# Altium PCB Logic_Unit_1st.PcbDoc
Units mil, origin at the board's own origin, x right, y up, seen from the top; angles counter-clockwise.
Board outline 2420 x 1955 mil, 2 copper layers (Top Layer, Bottom Layer); 18 components, 36 nets, 112 pads, 0 vias.
Unrouted connection lines stored in the file: 47.
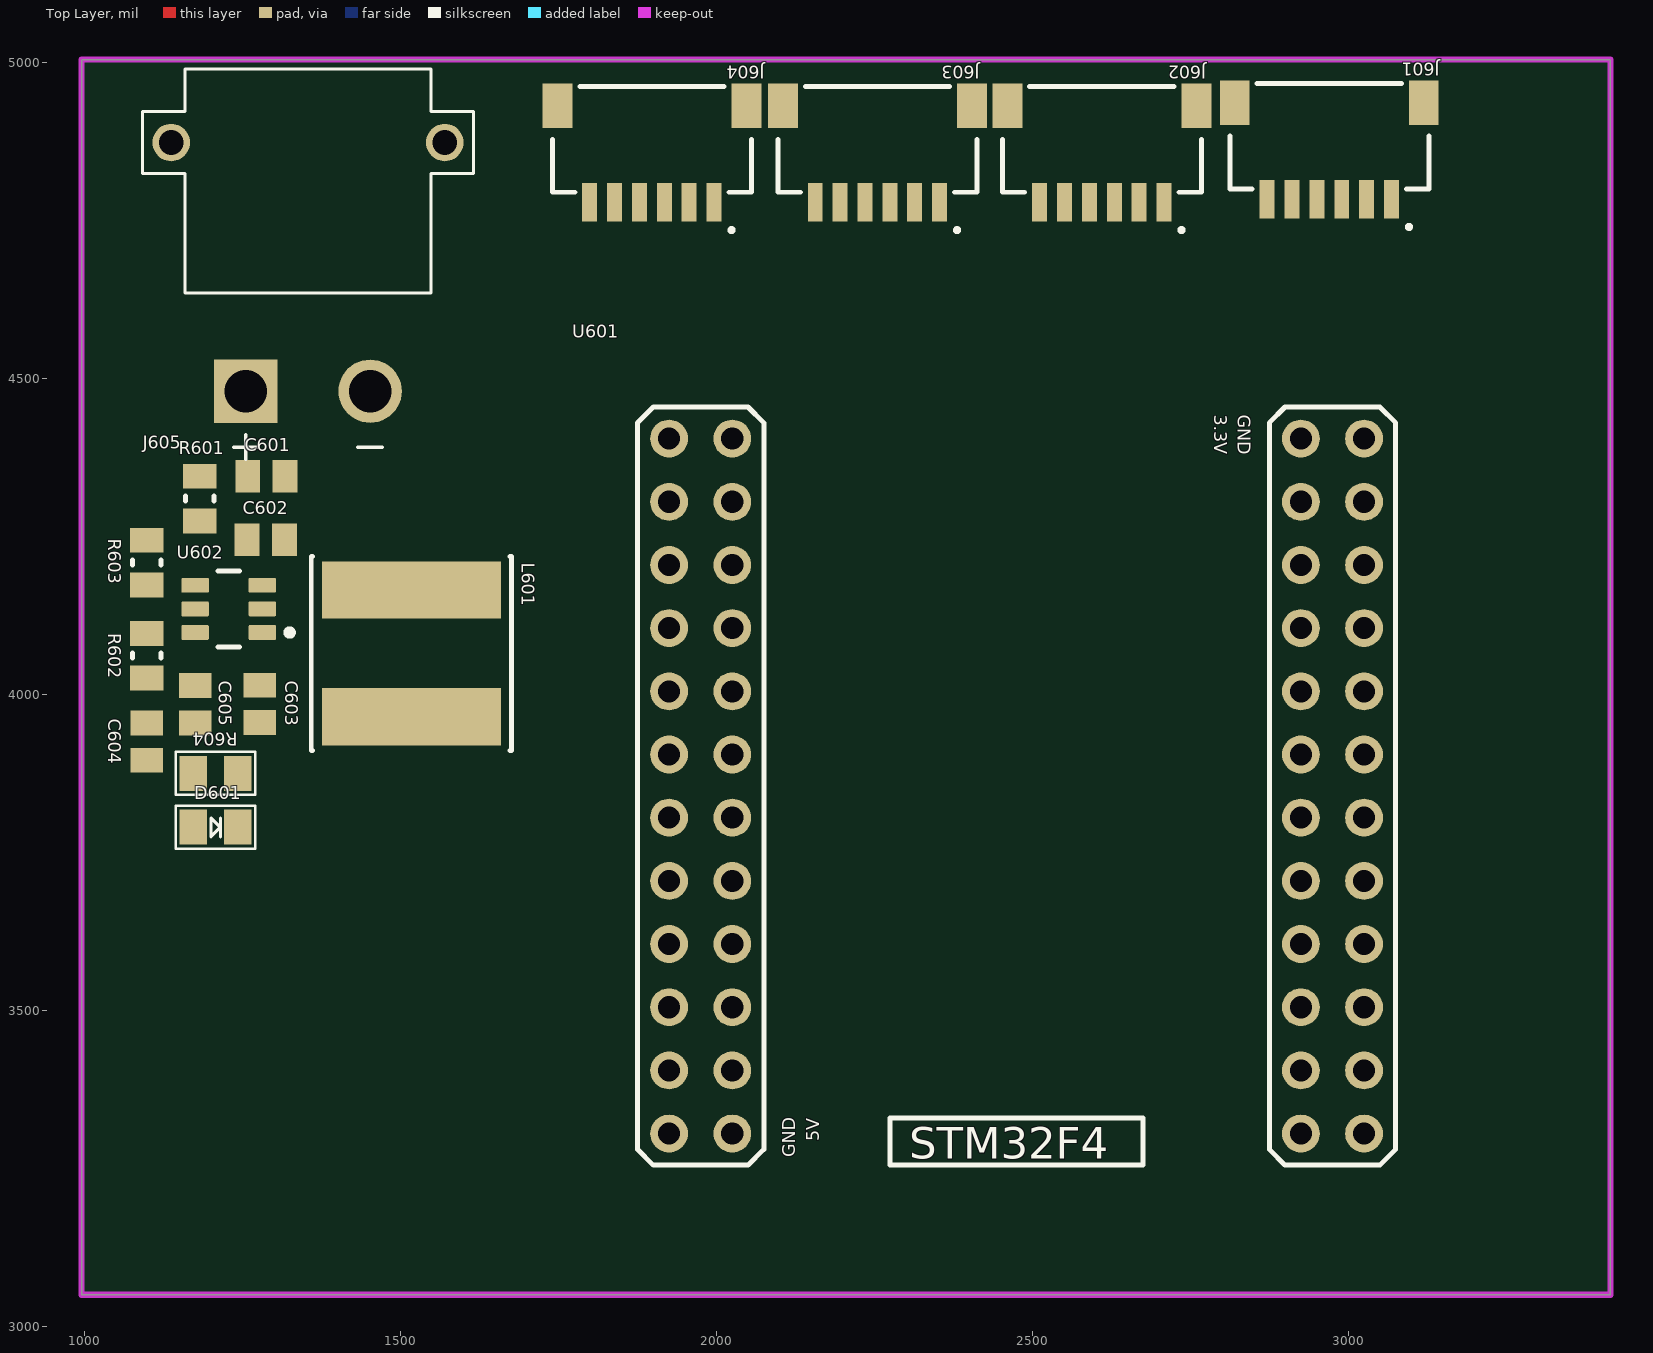
[diagram p0: Top Layer view]
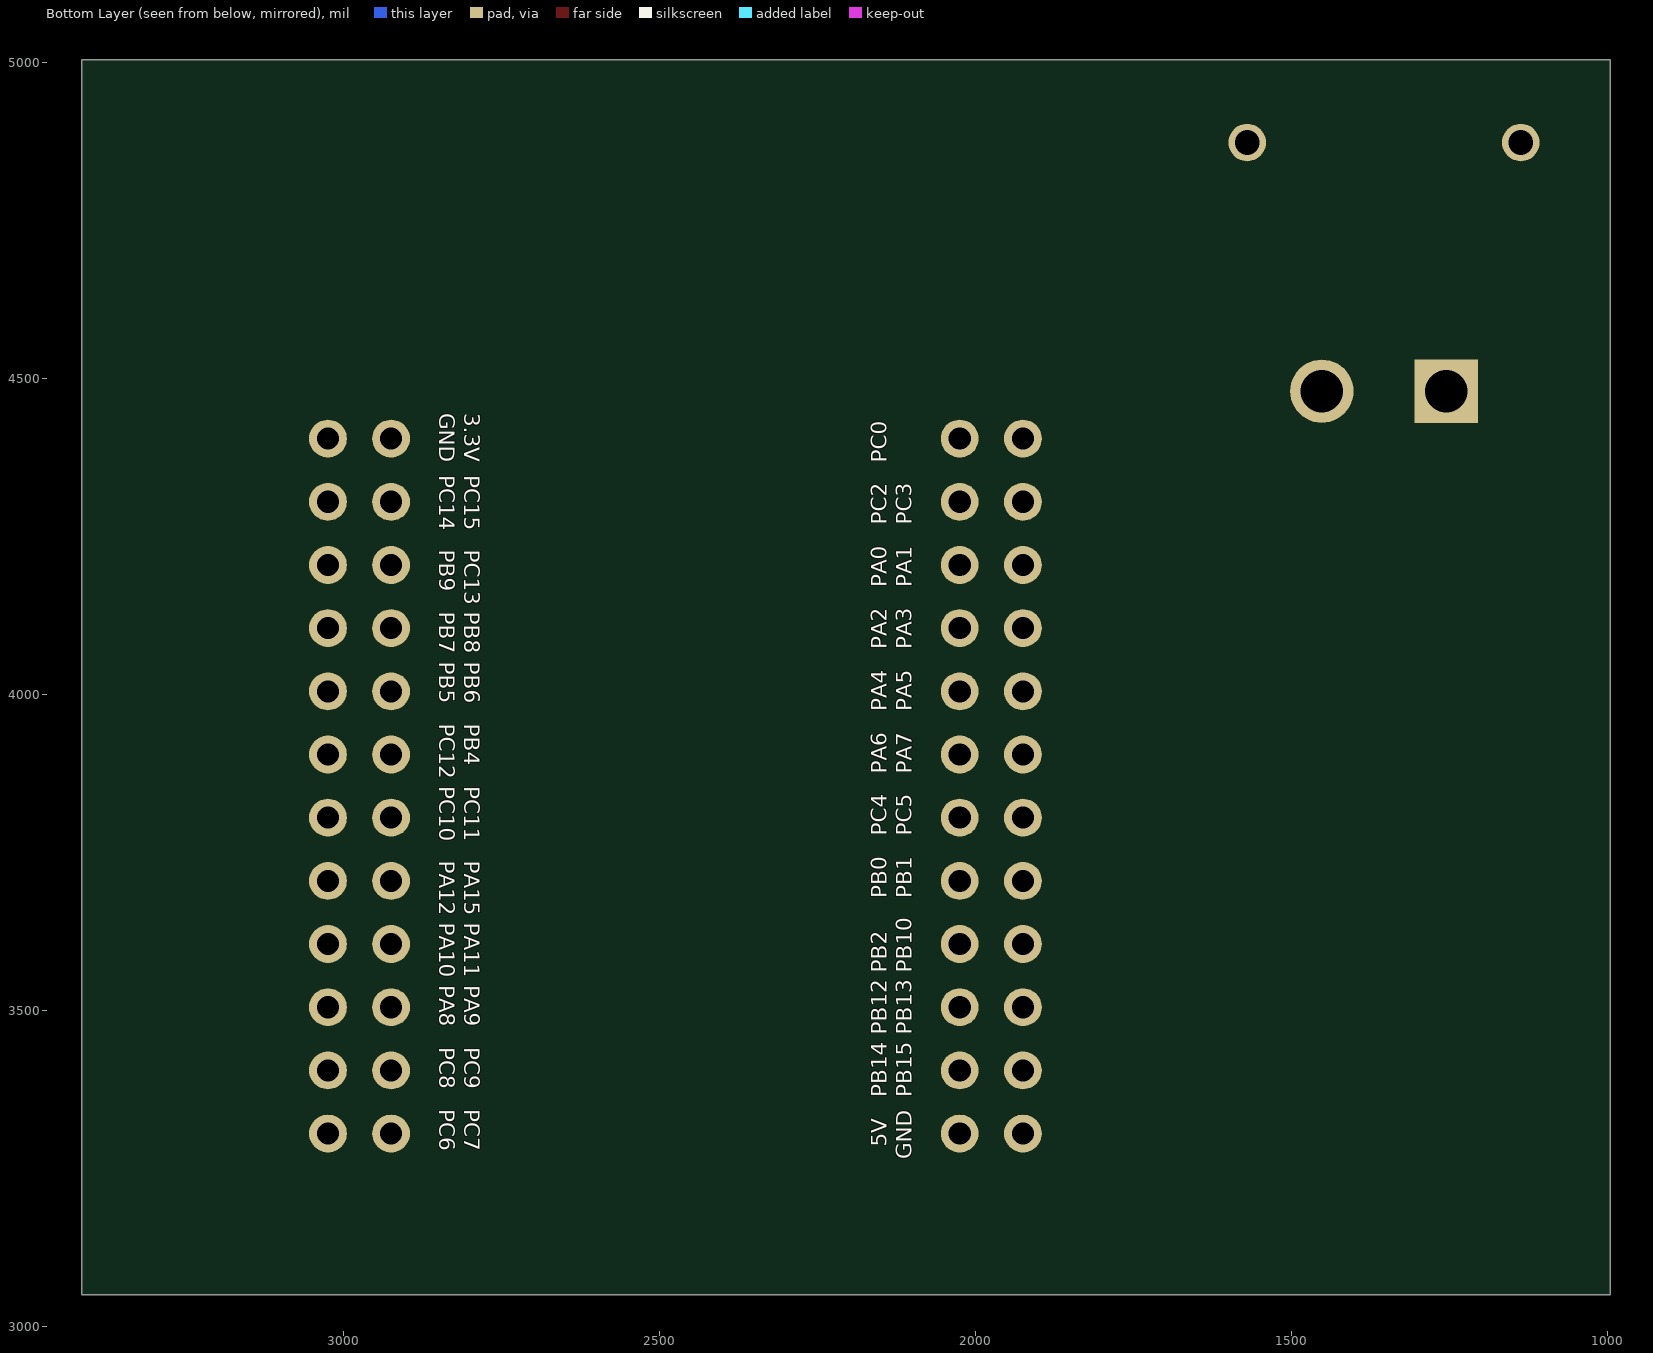
[diagram p1: Bottom Layer view, seen from below]

## Layer stack, top to bottom
Top Solder: solder mask 0.4, Solder Resist, Dk 3.5
Top Layer: signal copper 1.4
Dielectric 1: dielectric 12.6, FR-4, Dk 4.8
Bottom Layer: signal copper 1.4
Bottom Solder: solder mask 0.4, Solder Resist, Dk 3.5

## Board outline
995,3050 995,5005 3415,5005 3415,3050

## Design rules (kind name [scope] priority, off if disabled: settings)
Clearance [All] p1: gap=10 ignorepadtopadclearanceinfootprint=FALSE
PolygonConnect [All] p1: connectstyle=Relief reliefconductorwidth=10 reliefentries=4 polygonreliefangle="90 Angle" airgapwidth=10
RoutingVias [All] p1: holewidth=28 width=50 viastyle="Through Hole" minholewidth=28 minwidth=50 maxholewidth=28 maxwidth=50
SolderMaskExpansion [All] p1: expansion=4 istentingtop=FALSE
SupplyNets "Schematic Supply Nets_2" [InNet('3.3V')] p1: voltage=0.000
SupplyNets "Schematic Supply Nets_1" [InNet('5V')] p2: voltage=0.000
SupplyNets "Schematic Supply Nets" [InNet('GND')] p3: voltage=0.000
Width [All] p1: maxlimit=10 minlimit=10 preferedwidth=10
30 further rules are at their usual default settings.

## Classes and differential pairs
component class Designator: U601
component class Connector: J601 J602 J603 J604 J605
component class 5V_Regulator: C601 C602 C603 C604 C605 D601 L601 R601 R602 R603 R604 U602

## Components (designator, comment, footprint, x,y, rotation, side; value= is the part's Value field where it differs from the comment)
C601 "non-polar_Capacitor" 0805#1 1287.52,4345.47 r0 top
C602 "non-polar_Capacitor" 0805#1 1286.54,4245 r0 top
C603 "non-polar_Capacitor" 0805#1 1277.01,3985 r90 top
C604 "non-polar_Capacitor" 0805#1 1098.23,3925.47 r90 top
C605 "non-polar_Capacitor" 0805#1 1175.2,3984.53 r270 top
D601 "LED" SMD_LED 1207.01,3790 r180 top
J601 "SM06B-SRSS-TB__LF__SN_" SM06B-SRSS-TB 2970,4800 r180 top
J602 "SM06B-SRSS-TB__LF__SN_" SM06B-SRSS-TB 2610,4795 r180 top
J603 "SM06B-SRSS-TB__LF__SN_" SM06B-SRSS-TB 2254.7,4795 r180 top
J604 "SM06B-SRSS-TB__LF__SN_" SM06B-SRSS-TB 1897.72,4795 r180 top
J605 "XT30PW-M" AMASS_XT30PW-M 1353.43,4873.7 r0 top
L601 "inductor_SRP7030CA" FP-SRP7030CA-MFG 1517.01,4065 r0 top
R601 "Resistor" 0805#2 1182.01,4310.04 r270 top
R602 "Resistor" 0805#2 1098.23,4061.38 r270 top
R603 "Resistor" 0805#2 1098.23,4208.74 r270 top
R604 "Resistor" SMD_Resistor 1207.01,3875 r180 top
U601 "STM32_MODULE" DIP_STM32_MODULE 2475,3855 r0 top
U602 "TPS563200DDCR" FP-DDC0006A-MFG 1227.95,4135.47 r180 top

## Footprints (in the part's own frame and the unit in brackets; to place one, negate y for a bottom-side part, rotate by r counter-clockwise, add the part's x,y. Pads: shape width x height; smd on the part's side, far side on the other; paste and mask are expansions set on the pad)
0805#1 [mm] "Chip Capacitor, 2-Leads, Body 2.00x1.25mm, IPC High Density"
  rect 1x1.3 smd: 1(-0.75,0) 2(0.75,0)
  body extent -1.05,-0.67 1.05,0.68, height 1.35
0805#2 [mm] "SMD_Resistor"
  rect 1x1.35 smd: 1(-0.9,0) 2(0.9,0)
  silkscreen extent -0.1,-0.58 0.1,0.58, body extent -1.05,-0.67 1.05,0.67, height 0.55
AMASS_XT30PW-M [mm]
  round 2.55 hole 1.7: N(2.5,-10)
  rect 2.55x2.55 / inner round 2.55 / far side rect 2.55x2.55 hole 1.7: P(-2.5,-10)
  round 1.508 hole 1: S1(5.5,0) S2(-5.5,0)
  silkscreen extent -6.65,-12.75 6.65,2.95, body extent -6.65,-11 6.65,2.95, height 5
DIP_STM32_MODULE [mil]
  round 60 hole 35: 1(-550,550) 2(-550,450) 3(-550,350) 4(-550,250) 5(-550,150) 6(-550,50) 7(-550,-50) 8(-550,-150) 9(-550,-250) 10(-550,-350) 11(-550,-450) 12(-550,-550) 13(-450,-550) 14(-450,-450) 15(-450,-350) 16(-450,-250) 17(-450,-150) 18(-450,-50) 19(-450,50) 20(-450,150) 21(-450,250) 22(-450,350) 23(-450,450) 24(-450,550) 25(450,550) 26(450,450) 27(450,350) 28(450,250) 29(450,150) 30(450,50) 31(450,-50) 32(450,-150) 33(450,-250) 34(450,-350) 35(450,-450) 36(450,-550) 37(550,-550) 38(550,-450) 39(550,-350) 40(550,-250) 41(550,-150) 42(550,-50) 43(550,50) 44(550,150) 45(550,250) 46(550,350) 47(550,450) 48(550,550)
  silkscreen extent -600,-600 600,600, body extent -649,-650 650,649, height 685
FP-DDC0006A-MFG [mm]
  rrect17% 1.1x0.6 smd paste+0 mask+0: 1(-1.35,0.95) 2(-1.35,0) 3(-1.35,-0.95) 4(1.35,-0.95) 5(1.35,0) 6(1.35,0.95)
  silkscreen extent -2.58,-1.53 0.42,1.53, body extent -1.4,-1.45 1.4,1.45, height 1.1
FP-SRP7030CA-MFG [mm]
  rect 7.2x2.3 smd paste+0 mask+0: 1(0,2.55) 2(0,-2.55)
  silkscreen extent -4.03,-3.9 4.03,3.9, body extent -3.9,-3.8 3.9,3.8, height 3.1
SM06B-SRSS-TB [mm]
  rect 0.6x1.55 smd: 1(-2.5,0.4) 2(-1.5,0.4) 3(-0.5,0.4) 4(0.5,0.4) 5(1.5,0.4) 6(2.5,0.4)
  rect 1.2x1.8 smd: 7(3.8,-3.475) 8(-3.8,-3.475)
  silkscreen extent -4,-4.25 4,1.59, body extent -4,-4.18 4,0.77, height 2.96
SMD_LED [mm] "Chip Light Emitting Diode, 2-Leads, Body 1.60x0.80mm, IPC Medium Density"
  rect 1.1x1.4 smd: 1(-0.9,0) 2(0.9,0)
  silkscreen extent -1.6,-0.86 1.6,0.86, body extent -0.8,-0.38 0.8,0.42, height 0.81
SMD_Resistor [mm] "Chip Resistor, 2-Leads, Body 2.00x1.25mm, IPC Medium Density"
  rect 1.1x1.4 smd: 1(-0.9,0) 2(0.9,0)
  silkscreen extent -1.6,-0.86 1.6,0.86, body extent -1.1,-0.7 1.1,0.7, height 0.65

## Part data
C601 C602: library part CMP-024-000020-15, "SMD type ceramic capacitor", Capacitance=10µF, Voltage=25V, Design Item ID=Capacitor, Source=robit_passive.SchLib
C603: library part CMP-024-000020-15, "SMD type ceramic capacitor", Capacitance=0.1µF, Voltage=25V, Design Item ID=Capacitor, Source=robit_passive.SchLib
C604 C605: library part CMP-024-000020-15, "SMD type ceramic capacitor", Capacitance=22µF, Voltage=10V, Design Item ID=Capacitor, Source=robit_passive.SchLib
D601: library part CMP-026-000008-1, "Light Emitting Diode", Color=RED, Design Item ID=LED, Source=robit_passive.SchLib
J601 J602 J603 J604: "Connector", Manufacturer_Name="JST (JAPAN SOLDERLESS TERMINALS)", Manufacturer_Part_Number="SM06B-SRSS-TB (LF)(SN)", Datasheet Link=http://uk.rs-online.com/web/p/products/5468827
J605: library part CMP-019-000079-2, "Socket; DC supply; XT30; male; PIN: 2; on PCBs; THT; Colour: yellow", Package=None, Check_prices=https://www.snapeda.com/parts/XT30PW-M/AMASS/view-part/?ref=eda, Component Type=Standard, Design Item ID=XT30PW-M, MF=AMASS, MP=XT30PW-M, Pin Count=2, SnapEDA_Link=https://www.snapeda.com/parts/XT30PW-M/AMASS/view-part/?ref=snap, Source=XT30PW-M.SchLib, System=Connector
L601: library part CMP-028-000006-1, "General Purpose Inductor, 6.8uH, 20%, 1 Element, Powdered Metal Alloy-Core, SMD, 3130", Inductance=3.3µH
R601 R603: library part CMP-029-000004-8, "SMD type resistor", Resistance=10k, Design Item ID=Resistor, Source=robit_passive.SchLib
R602: library part CMP-029-000004-8, "SMD type resistor", Resistance=54.9k, Design Item ID=Resistor, Source=robit_passive.SchLib
R604: library part CMP-029-000004-1, "SMD type resistor", Resistance=330, Design Item ID=Resistor, Source=robit_passive.SchLib
U601: library part CMP-021-000010-1, "processor", Design Item ID=STM32_MODULE, Source=robit_ic.SchLib
U602: library part CMP-04918-000155-1, "IC REG BUCK ADJ 3A TSOT23-6", Case/Package=SOT-23-6, Max Input Voltage=17V, Max Operating Temperature=125°C, Max Output Current=3A, Max Output Voltage=7V, Min Input Voltage=4.5V, Min Operating Temperature=-40°C, Min Output Voltage=760mV, Quiescent Current=190uA, Switching Frequency=650kHz, Contact Plating=Tin, Lead Free="Lead Free", Mount="Surface Mount", Number of Outputs=1, Operating Supply Voltage=17V, Output Configuration=Positive, Output Current=3A, Output Type=Adjustable, Output Voltage=7V, Packaging="Tape and Reel", Radiation Hardening=No, Synchronous Rectifier=Yes

## Nets (pads, with @x,y where several pads share a name; then routed paths per layer and width w, separated by ;. In a path a pad name is that pad's centre, name@x,y a point inside that pad or via, vN(x,y) a via of type N, cw(c..) or ccw(c..) an arc to the next point about the centre after c; other vN are vias at no path point)
5V: C604.2 C605.2 L601.2 R602.2 R604.1
12V_IN: C601.2 C602.2 J605.P R601.1 U602.3
EN: R601.2 U602.5
GND: C604.1 C605.1 D601.1 J605.N U601.12 U601.48 U602.1
NetC601_1: C601.1 C602.1 R603.1
NetD601_2: D601.2 R604.2
NetJ601_1: J601.1 U601.3
NetJ601_2: J601.2 U601.22
NetJ601_3: J601.3 U601.11
NetJ601_4: J601.4 U601.14
NetJ601_5: J601.5 U601.10
NetJ601_6: J601.6 U601.15
NetJ602_1: J602.1 U601.4
NetJ602_2: J602.2 U601.21
NetJ602_3: J602.3 U601.8
NetJ602_4: J602.4 U601.17
NetJ602_5: J602.5 U601.35
NetJ602_6: J602.6 U601.38
NetJ603_1: J603.1 U601.46
NetJ603_2: J603.2 U601.28
NetJ603_3: J603.3 U601.36
NetJ603_4: J603.4 U601.37
NetJ603_5: J603.5 U601.7
NetJ603_6: J603.6 U601.18
NetJ604_1: J604.1 U601.44
NetJ604_2: J604.2 U601.30
NetJ604_3: J604.3 U601.2
NetJ604_4: J604.4 U601.23
NetJ604_5: J604.5 U601.1
NetJ604_6: J604.6 U601.24
PA5: U601.5
PA6: U601.19
PA7: U601.6
SW: C603.2 L601.1 U602.2
VBST: C603.1 U602.6
VFB: R602.1 R603.2 U602.4
pads on no net: J601.7 J601.8 J602.7 J602.8 J603.7 J603.8 J604.7 J604.8 J605.S1 J605.S2 U601.9 U601.13 U601.16 U601.20 U601.25 U601.26 U601.27 U601.29 U601.31 U601.32 U601.33 U601.34 U601.39 U601.40 U601.41 U601.42 U601.43 U601.45 U601.47

## Keep-outs
Top Layer:
  the board outline again, w10

## Text inside footprints (layer, text, board x,y; h text height)
U601: Top Overlay "STM32F4" at 2305,3265 h50; Top Overlay "GND" at 2825,4442.5 h20 r270; Top Overlay "3.3V" at 2787.5,4442.5 h20 r270; Top Overlay "GND" at 2125,3267.5 h20 r90; Top Overlay "5V" at 2162.5,3292.5 h20 r90; Bottom Overlay "PB13" at 2100.98,3461.3 h25 r270; Bottom Overlay "PB15" at 2100.98,3362.87 h25 r270; Bottom Overlay "PB1" at 2100.98,3677.83 h25 r270; Bottom Overlay "PB14" at 2140.35,3362.87 h25 r270; Bottom Overlay "PB12" at 2140.35,3461.3 h25 r270; Bottom Overlay "PB2" at 2140.35,3559.72 h25 r270; Bottom Overlay "PB10" at 2100.98,3559.72 h25 r270; Bottom Overlay "PB0" at 2140.35,3677.83 h25 r270; Bottom Overlay "PC5" at 2100.98,3776.26 h25 r270; Bottom Overlay "PC4" at 2140.35,3776.26 h25 r270; Bottom Overlay "PA7" at 2100.98,3874.68 h25 r270; Bottom Overlay "PA1" at 2100.98,4169.96 h25 r270; Bottom Overlay "PA5" at 2100.98,3973.11 h25 r270; Bottom Overlay "PA3" at 2100.98,4071.54 h25 r270; Bottom Overlay "PA6" at 2140.35,3874.68 h25 r270; Bottom Overlay "PA4" at 2140.35,3973.11 h25 r270; Bottom Overlay "PA2" at 2140.35,4071.54 h25 r270; Bottom Overlay "PA0" at 2140.35,4169.96 h25 r270; Bottom Overlay "PC3" at 2100.98,4268.39 h25 r270; Bottom Overlay "PC2" at 2140.35,4268.39 h25 r270; Bottom Overlay "PC0" at 2140.35,4366.81 h25 r270; Bottom Overlay "PC7" at 2809.65,3343.19 h25 r90; Bottom Overlay "PC6" at 2849.02,3343.19 h25 r90; Bottom Overlay "PC8" at 2849.02,3441.61 h25 r90; Bottom Overlay "PC9" at 2809.65,3441.61 h25 r90; Bottom Overlay "PA8" at 2849.02,3540.04 h25 r90; Bottom Overlay "PA9" at 2809.65,3540.04 h25 r90; Bottom Overlay "PA10" at 2849.02,3638.46 h25 r90; Bottom Overlay "PA11" at 2809.65,3638.46 h25 r90; Bottom Overlay "PA12" at 2849.02,3736.89 h25 r90; Bottom Overlay "PA15" at 2809.65,3736.89 h25 r90; Bottom Overlay "PC10" at 2849.02,3855 h25 r90; Bottom Overlay "PC11" at 2809.65,3855 h25 r90; Bottom Overlay "PC12" at 2849.02,3953.43 h25 r90; Bottom Overlay "PB4" at 2809.65,3953.43 h25 r90; Bottom Overlay "PB5" at 2849.02,4051.85 h25 r90; Bottom Overlay "PB6" at 2809.65,4051.85 h25 r90; Bottom Overlay "PB8" at 2809.65,4130.59 h25 r90; Bottom Overlay "PB7" at 2849.02,4130.59 h25 r90; Bottom Overlay "PC13" at 2809.65,4229.02 h25 r90; Bottom Overlay "PB9" at 2849.02,4229.02 h25 r90; Bottom Overlay "PC14" at 2849.02,4347.13 h25 r90; Bottom Overlay "PC15" at 2809.65,4347.13 h25 r90; Bottom Overlay "GND" at 2100.98,3264.45 h25 r270; Bottom Overlay "5V" at 2140.35,3284.13 h25 r270; Bottom Overlay "3.3V" at 2809.65,4445.55 h25 r90; Bottom Overlay "GND" at 2849.02,4445.55 h25 r90